# Altium PCB jz_control0301.PcbDoc
Units mm, origin at the board's own origin, x right, y up, seen from the top; angles counter-clockwise.
Board outline 62.1 x 70.23 mm, 2 copper layers (Top Layer, Bottom Layer); 42 components, 42 nets, 230 pads, 18 vias.
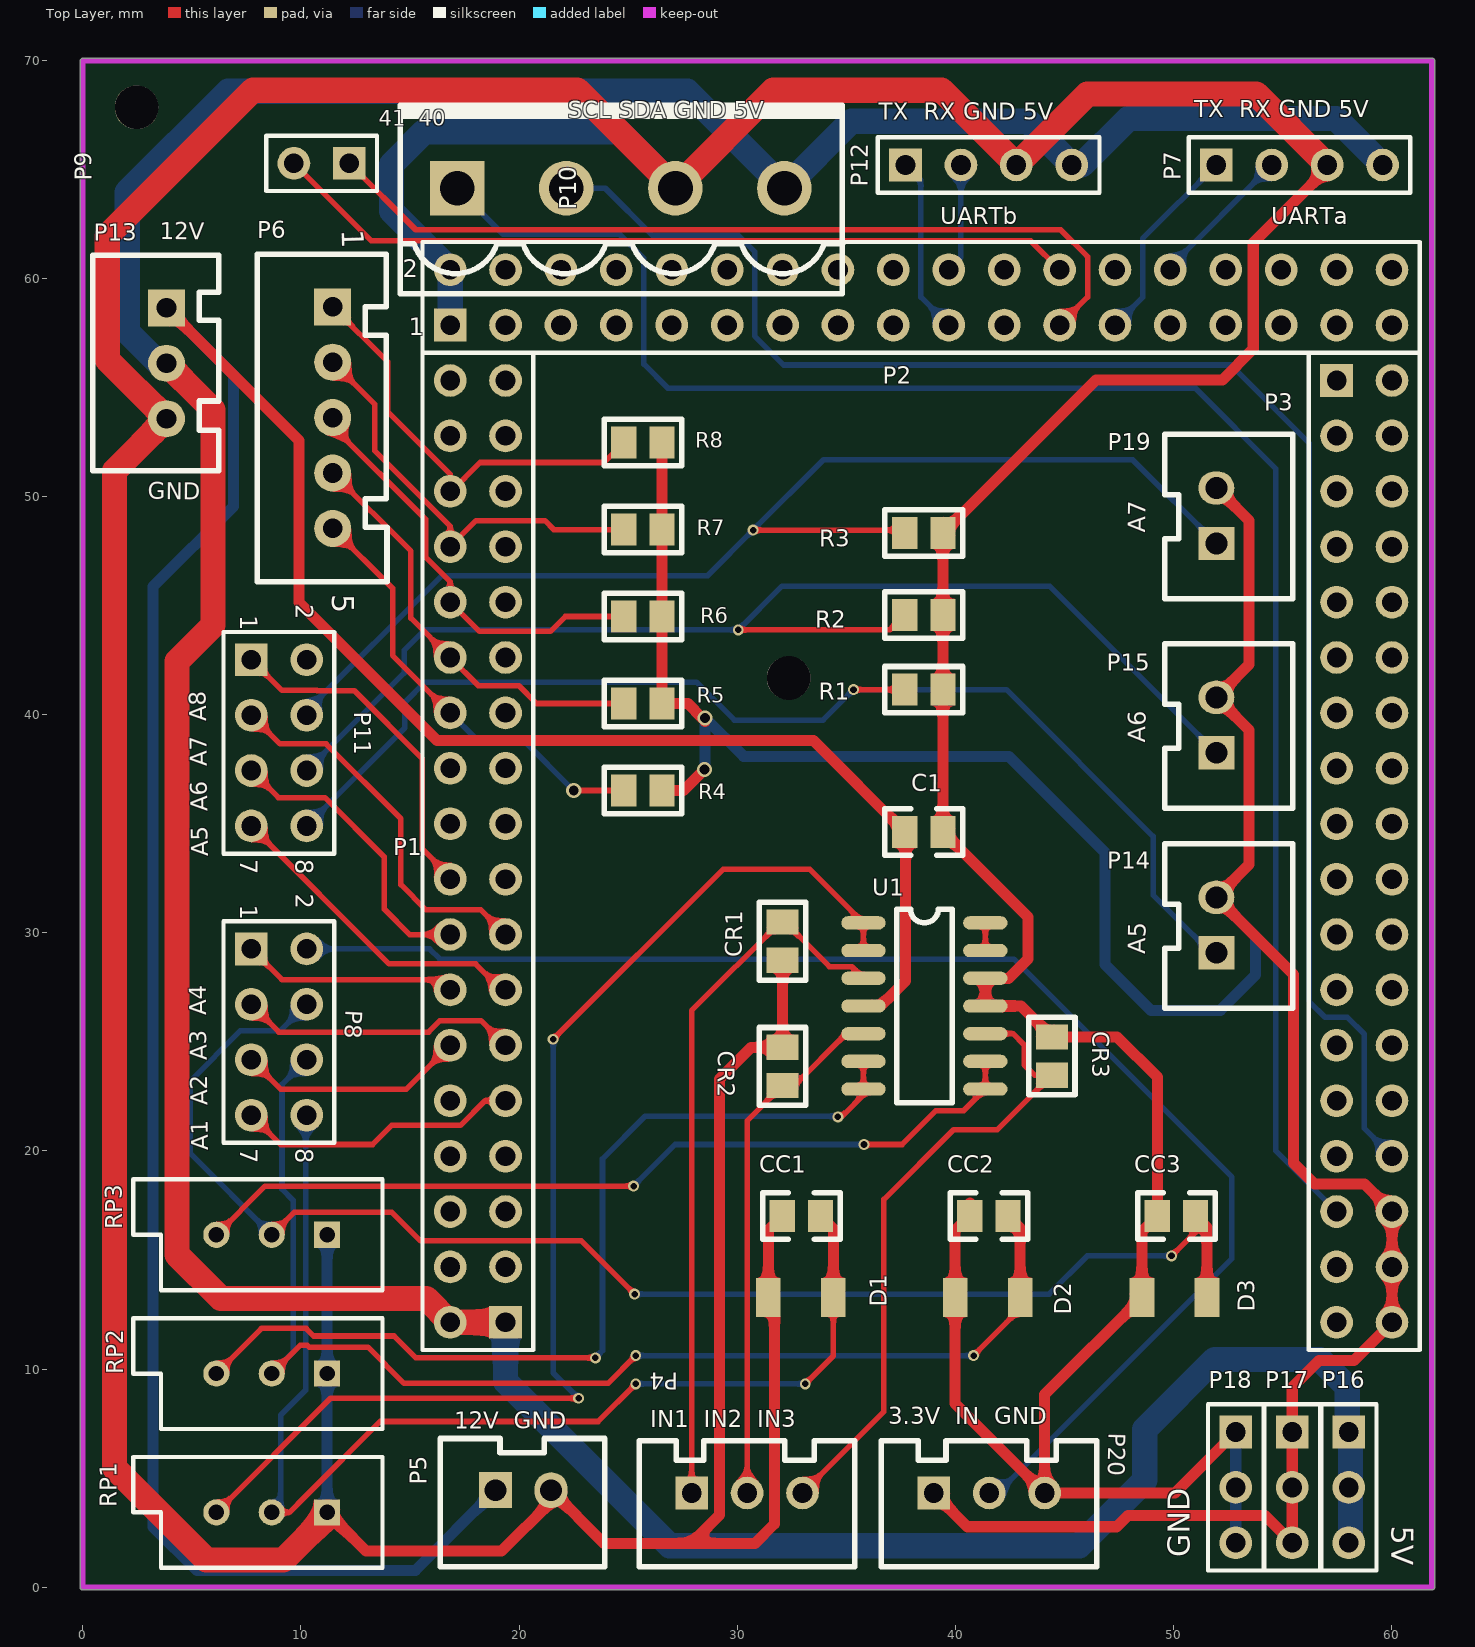
[diagram p0: Top Layer view]
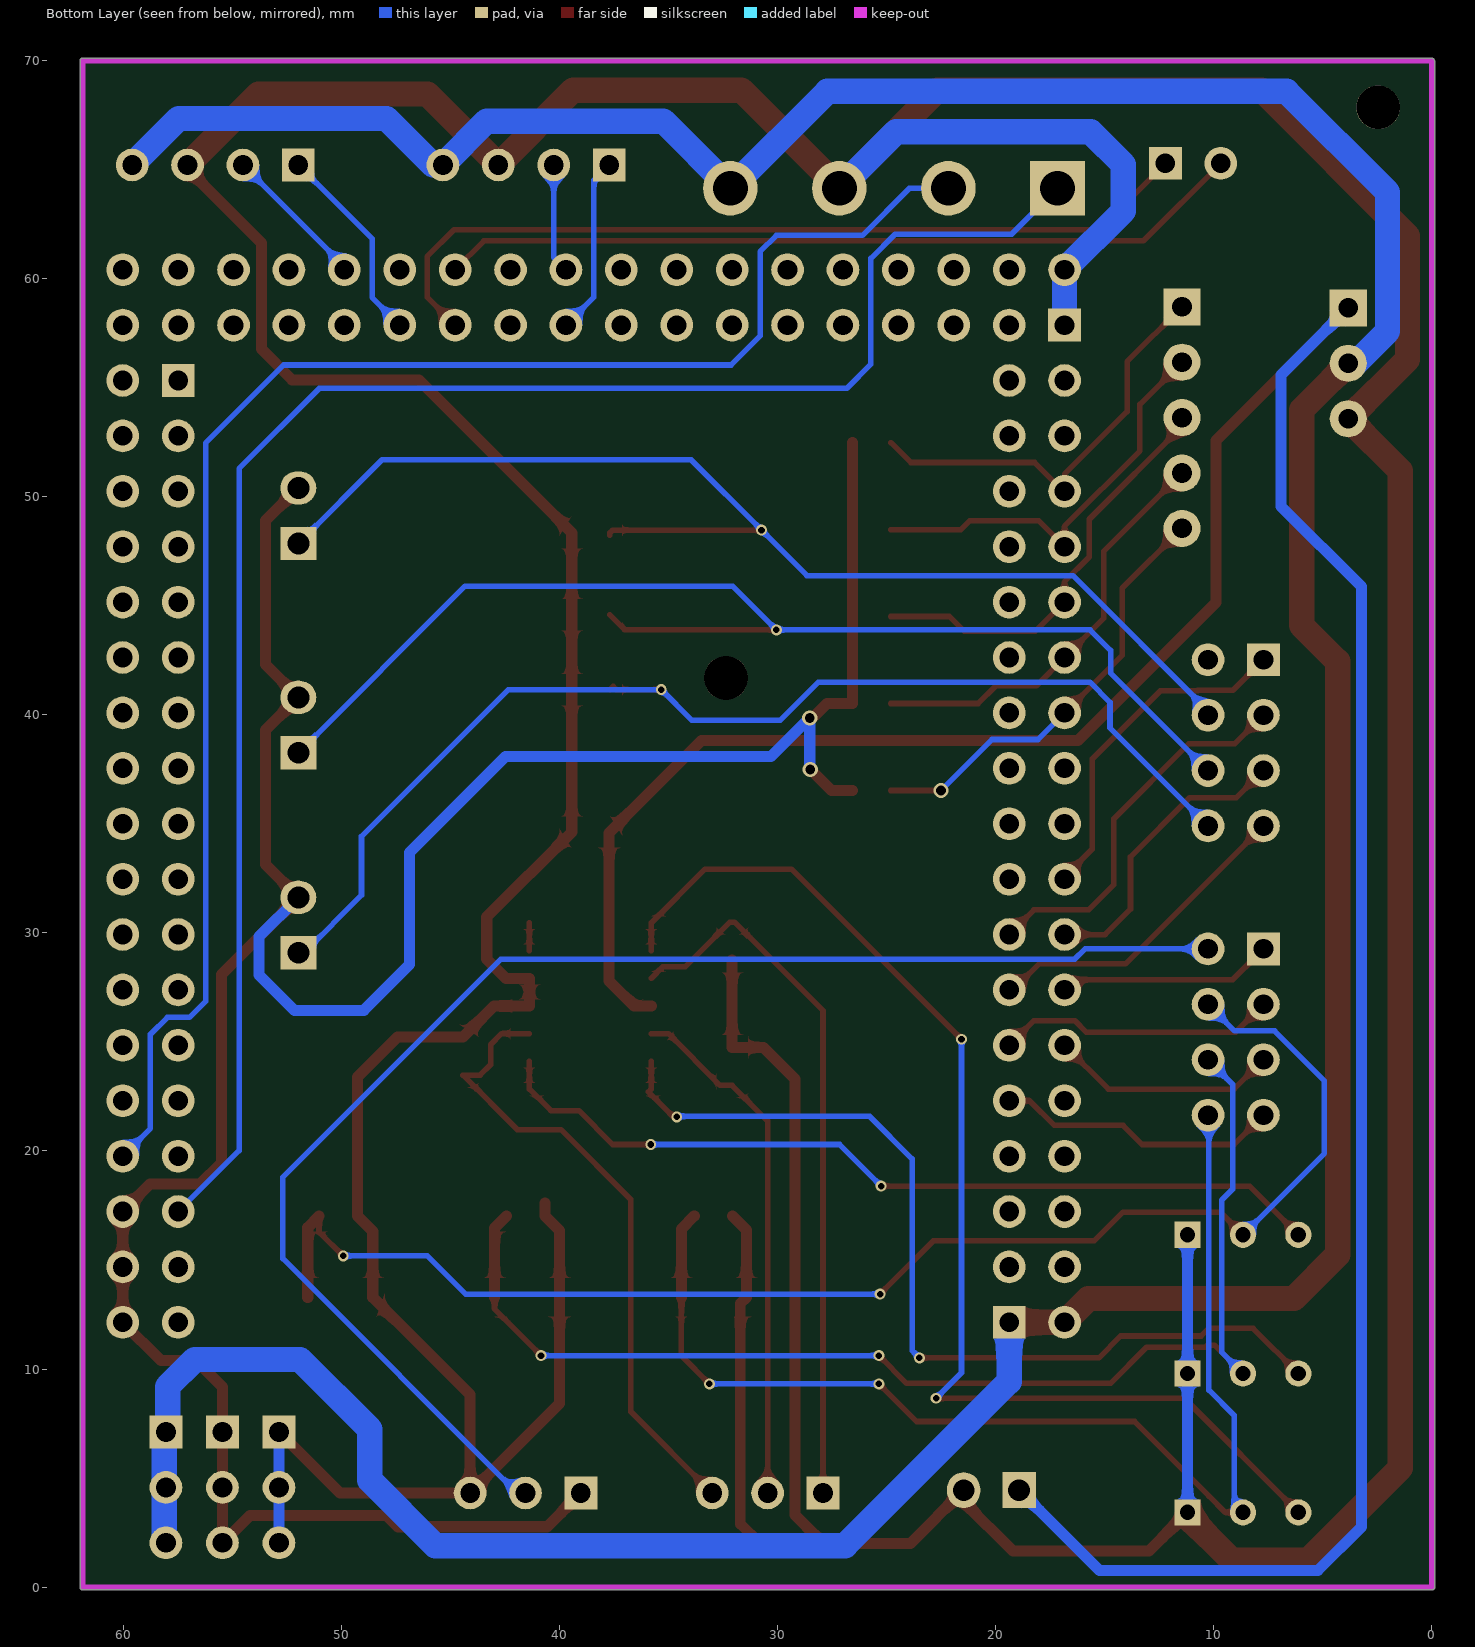
[diagram p1: Bottom Layer view, seen from below]

## Layer stack, top to bottom
Top Solder: solder mask 0.0102, Solder Resist, Dk 3.5
Top Layer: signal copper 0.0356
Dielectric 1: dielectric 0.32, FR-4, Dk 4.8
Bottom Layer: signal copper 0.0356
Bottom Solder: solder mask 0.0102, Solder Resist, Dk 3.5

## Board outline
-0.127,0 -0.127,69.952 cw(c0,69.952) -0.076,70.053 cw(c0.025,69.977) 0.025,70.104 61.849,70.104 cw(c61.849,69.977) 61.976,69.977 61.976,0 cw(c61.849,0) 61.849,-0.127 0,-0.127 cw(c0,0)

## Design rules (kind name [scope] priority, off if disabled: settings)
Clearance [All] p1: gap=0.254 ignorepadtopadclearanceinfootprint=FALSE except(0: Arc-Hole Track-Hole SMDPad-Hole THPad-Hole Via-Hole Fill-Hole Poly-Hole Region-Hole Text-Hole)
MinimumSolderMaskSliver [All] p1: minsoldermaskwidth=0.178
PolygonConnect [All] p1: connectstyle=Relief reliefconductorwidth=0.254 reliefentries=4 polygonreliefangle="90 Angle" airgapwidth=0.254
RoutingVias [All] p1: holewidth=0.3 width=0.5 viastyle="Through Hole" minholewidth=0.3 minwidth=0.5 maxholewidth=0.711 maxwidth=1.27
SilkToSilkClearance [All] p1: silktosilkclearance=0
SilkToSolderMaskClearance [IsPad] p1: minsilkscreentomaskgap=0 clearancetoexposedcopper=TRUE
SolderMaskExpansion [All] p1: expansion=0.102
Width [All] p1: maxlimit=2.54 minlimit=0.254 preferedwidth=0.254 minimp=50.000000 maximp=50.000000 favimp=50.000000
Width GND [InNet('GND')] p2: maxlimit=2.54 minlimit=0.254 preferedwidth=0.254 minimp=50.000000 maximp=50.000000 favimp=50.000000
Width 3.3V [InNet('VDD3.3')] p3: maxlimit=2.54 minlimit=0.254 preferedwidth=0.508 minimp=50.000000 maximp=50.000000 favimp=50.000000
Width 5V [InNet('V5')] p4: maxlimit=2.54 minlimit=0.254 preferedwidth=1.27 minimp=50.000000 maximp=50.000000 favimp=50.000000
Width POWER [InNet('POWERA')] p5: maxlimit=2.54 minlimit=0.254 preferedwidth=0.508 minimp=50.000000 maximp=50.000000 favimp=50.000000
27 further rules are at their usual default settings.

## Components (designator, comment, footprint, x,y, rotation, side; value= is the part's Value field where it differs from the comment)
C1 "104" LC-0805_C 38.557,34.62 r0 top
CC1 "105" LC-0805_C 32.944,17.018 r0 top
CC2 "105" LC-0805_C 41.542,17.018 r0 top
CC3 "105" LC-0805_C 50.14,17.018 r0 top
CR1 "150" LC-0805_R 32.08,29.616 r270 top
CR2 "150" LC-0805_R 32.08,23.876 r90 top
CR3 "150" LC-0805_R 44.425,24.347 r90 top
D1 "Diode  Zener" LC-1206 32.918,13.284 r0 top
D2 "Diode  Zener" LC-1206 41.482,13.284 r0 top
D3 "Diode  Zener" LC-1206 50.047,13.284 r0 top
P1 "Header 18X2" HDR2X18 19.38,12.141 r90 top locked
P2 "Header 18X2" HDR2X18 16.84,57.861 r0 top locked
P3 "Header 18X2" HDR2X18 57.48,55.321 r270 top locked
P4 "Header 3" XH2.54-3 27.915,4.318 r0 top
P5 "Header 2" XH2.54-2 21.466,4.445 r0 top
P6 "Header 5" XH2.54-LI-5P 11.455,53.619 r270 top
P7 "Header 4" HDR1X4 51.968,65.202 r0 top
P8 "Header 4X2" HDR2X4 7.722,29.261 r270 top
P9 "Header 2" HDR1X2 12.217,65.278 r180 top
P10 "Header 4" KF2EDGK5.0-LI-4P 24.663,64.135 r0 top
P11 "Header 4X2" HDR2X4 7.722,42.52 r270 top
P12 "Header 4" HDR1X4 37.719,65.202 r0 top
P13 "Header 3" XH2.54-LI-3P 3.835,56.109 r270 top
P14 "Header 2" XH2.54-2 51.968,31.626 r90 top
P15 "Header 2" XH2.54-2 51.968,40.795 r90 top
P16 "Header 3" HDR1X3 58.039,7.112 r270 top
P17 "Header 3" HDR1X3 55.448,7.112 r270 top
P18 "Header 3" HDR1X3 52.857,7.112 r270 top
P19 "Header 2" XH2.54-2 51.968,50.396 r90 top
P20 "Header 3" XH2.54-3 39.014,4.318 r0 top
R1 "3.3K" LC-0805_R 38.557,41.148 r0 top value=30K
R2 "3.3K" LC-0805_R 38.557,44.577 r0 top value=30K
R3 "3.3K" LC-0805_R 38.557,48.336 r0 top value=30K
R4 "150" LC-0805_R 25.679,36.525 r180 top
R5 "150" LC-0805_R 25.679,40.513 r180 top
R6 "150" LC-0805_R 25.679,44.501 r180 top
R7 "150" LC-0805_R 25.679,48.489 r180 top
R8 "150" LC-0805_R 25.679,52.476 r180 top
RP1 "10K" VR5 8.661,3.429 r180 top
RP2 "10K" VR5 8.661,9.792 r180 top
RP3 "10K" VR5 8.661,16.154 r180 top
U1 "LM324AD" SO-14 32.182,32.385 r0 top

## Footprints (in the part's own frame and the unit in brackets; to place one, negate y for a bottom-side part, rotate by r counter-clockwise, add the part's x,y. Pads: shape width x height; smd on the part's side, far side on the other; paste and mask are expansions set on the pad)
HDR1X2 [mm] "Connector; Header; 2 Position"
  rect 1.5x1.5 hole 0.9: 1(0,0)
  round 1.5 hole 0.9: 2(2.54,0)
  silkscreen extent -1.27,-1.27 3.81,1.27
HDR1X3 [mm] "Connector; Header; 3 Position"
  rect 1.5x1.5 hole 0.9: 1(0,0)
  round 1.5 hole 0.9: 2(2.54,0) 3(5.08,0)
  silkscreen extent -1.27,-1.27 6.35,1.27
HDR1X4 [mm] "Connector; Header; 4 Position"
  rect 1.5x1.5 hole 0.9: 1(0,0)
  round 1.5 hole 0.9: 2(2.54,0) 3(5.08,0) 4(7.62,0)
  silkscreen extent -1.27,-1.27 8.89,1.27
HDR2X4 [mm] "Connector; Header; 4x2 Position"
  rect 1.5x1.5 hole 0.9: 1(0,0)
  round 1.5 hole 0.9: 2(0,2.54) 3(2.54,0) 4(2.54,2.54) 5(5.08,0) 6(5.08,2.54) 7(7.62,0) 8(7.62,2.54)
  silkscreen extent -1.27,-1.27 8.89,3.81
HDR2X18 [mm] "Connector; Header; 18x2 Position"
  rect 1.5x1.5 hole 0.9: 1(0,0)
  round 1.5 hole 0.9: 2(0,2.54) 3(2.54,0) 4(2.54,2.54) 5(5.08,0) 6(5.08,2.54) 7(7.62,0) 8(7.62,2.54) 9(10.16,0) 10(10.16,2.54) 11(12.7,0) 12(12.7,2.54) 13(15.24,0) 14(15.24,2.54) 15(17.78,0) 16(17.78,2.54) 17(20.32,0) 18(20.32,2.54) 19(22.86,0) 20(22.86,2.54) 21(25.4,0) 22(25.4,2.54) 23(27.94,0) 24(27.94,2.54) 25(30.48,0) 26(30.48,2.54) 27(33.02,0) 28(33.02,2.54) 29(35.56,0) 30(35.56,2.54) 31(38.1,0) 32(38.1,2.54) 33(40.64,0) 34(40.64,2.54) 35(43.18,0) 36(43.18,2.54)
  silkscreen extent -1.27,-1.27 44.45,3.81
KF2EDGK5.0-LI-4P [mm] "立插端子"
  rect 2.5x2.5 hole 1.6: 1(-7.5,0)
  round 2.5 hole 1.6: 2(-2.5,0) 3(2.5,0) 4(7.5,0)
  silkscreen extent -10.12,-4.83 10.17,3.81, body extent -10.04,-4.75 10.04,3.75, height 11.25
LC-0805_C [mm]
  rect 1.16x1.47 smd: 1(-0.875,0) 2(0.875,0)
  silkscreen extent -1.78,-1.06 1.78,1.06, body extent -1,-0.63 1,0.63, height 0.77
LC-0805_R [mm]
  rect 1.16x1.47 smd: 1(-0.875,0) 2(0.875,0)
  silkscreen extent -1.78,-1.06 1.78,1.06, body extent -1,-0.62 1,0.63, height 0.49
LC-1206 [mm]
  rect 1.13x1.8 smd: 1(-1.49,0) 2(1.49,0)
SO-14 [mil]
  oval 80x24 smd: 1(142,-76) 2(142,-126) 3(142,-176) 4(142,-226) 5(142,-276) 6(142,-326) 7(142,-376) 8(362,-376) 9(362,-326) 10(362,-276) 11(362,-226) 12(362,-176) 13(362,-126) 14(362,-76)
  silkscreen extent 202,-401 302,-51
VR5 [mm] "Thru-Hole; 3 Leads"
  rect 1.2x1.2 hole 0.7: 1(-2.54,0)
  round 1.2 hole 0.7: 2(0,0) 3(2.54,0)
  silkscreen extent -5.08,-2.54 6.35,2.54
XH2.54-2 [mil]
  rect 60x65 hole 39.37: 1(-100.1,0)
  oval 60x65 hole 39.37: 2(0,0)
  silkscreen extent -200,-138 97,93, body extent -198,-142 98,94, height 276
XH2.54-3 [mm]
  rect 1.5x1.5 hole 0.9: 1(0,0)
  round 1.5 hole 0.9: 2(2.54,0) 3(5.08,0)
  silkscreen extent -2.41,-3.38 7.47,2.39, body extent -2.41,-3.41 7.49,2.34, height 7
XH2.54-LI-3P [mm] "接插件，3P"
  rect 1.7x1.7 hole 0.9: 1(-2.54,0)
  round 1.7 hole 0.9: 2(0,0) 3(2.54,0)
  silkscreen extent -4.95,-3.38 4.93,2.39, body extent -5.04,-3.3 5.04,2.4, height 7.03
XH2.54-LI-5P [mm] "接插件，5P"
  rect 1.7x1.7 hole 0.9: 1(-5.08,0)
  round 1.7 hole 0.9: 2(-2.54,0) 3(0,0) 4(2.54,0) 5(5.08,0)
  silkscreen extent -7.48,-3.45 7.52,2.49, body extent -7.58,-3.3 7.58,2.4, height 7.03

## Part data
C1: library part CAP(瓷片,104), "1.02.08.0014"
CC1 CC2 CC3: library part "Cap Chip 0805", "Polarized Capacitor (Radial)", Published=8-Jun-2000, Publisher="Altium Limited", Revision="July-2002: Re-released for DXP Platform."
CR1 CR2 CR3 R4 R5 R6 R7 R8: library part "Resistor Chip 0805", "Resistor", Published=8-Jun-2000, Publisher="Altium Limited", Revision="July-2002: Re-released for DXP Platform."
D1 D2 D3: "Zener Diode", Published=8-Jun-2000, Publisher="Altium Limited", Revision="July-2002: Re-released for DXP Platform."
P1 P2 P3: "Header, 18-Pin, Dual row", LatestRevisionDate=17-Jul-2002, LatestRevisionNote="Re-released for DXP Platform.", Publisher="Altium Limited"
P4 P13 P16 P17 P18 P20: "Header, 3-Pin", LatestRevisionDate=17-Jul-2002, LatestRevisionNote="Re-released for DXP Platform.", Publisher="Altium Limited"
P5 P9 P14 P15 P19: "Header, 2-Pin", LatestRevisionDate=17-Jul-2002, LatestRevisionNote="Re-released for DXP Platform.", Publisher="Altium Limited"
P6: "Header, 5-Pin", LatestRevisionDate=17-Jul-2002, LatestRevisionNote="Re-released for DXP Platform.", Publisher="Altium Limited"
P7 P10 P12: "Header, 4-Pin", LatestRevisionDate=17-Jul-2002, LatestRevisionNote="Re-released for DXP Platform.", Publisher="Altium Limited"
P8 P11: "Header, 4-Pin, Dual row", LatestRevisionDate=17-Jul-2002, LatestRevisionNote="Re-released for DXP Platform.", Publisher="Altium Limited"
R1 R2 R3: library part Res2, "Resistor", LatestRevisionDate=17-Jul-2002, LatestRevisionNote="Re-released for DXP Platform.", PackageDescription="Axial Device, Thru-Hole; 2 Leads; 0.4 in Pin Spacing", PackageReference=AXIAL-0.4, Published=8-Jun-2000, Publisher="Altium Limited"
RP1 RP2 RP3: library part Res_t
U1: "Quadruple Operational Amplifier", PackageDocument=Jan-1998, ComponentLink1Description="Manufacturer Link", ComponentLink1URL=http://www.ti.com/, DatasheetDocument=Jan-1989, LatestRevisionDate=4-Mar-2005, LatestRevisionNote="Stylized 3D Model Added.", PackageReference=D014, Published=15-Apr-2002, Publisher="Altium Limited"

## Free pads (board coordinates)
  round 2 hole 2 unplated: 2(2.464,67.843) 3(32.36,41.681)

## Via types
v1: diameter 0.5, hole 0.3, Top Layer to Bottom Layer, 15 vias
v2: diameter 0.7, hole 0.45, Top Layer to Bottom Layer, 3 vias

## Nets (pads, with @x,y where several pads share a name; then routed paths per layer and width w, separated by ;. In a path a pad name is that pad's centre, name@x,y a point inside that pad or via, vN(x,y) a via of type N, cw(c..) or ccw(c..) an arc to the next point about the centre after c; other vN are vias at no path point)
A1: CC1.2 D1.2 P8.8 RP1.2 | length 54.5
  Top Layer w0.254: RP1.2 9.474,3.429 10.22,4.175 10.22,4.187 13.628,7.595 23.622,7.595 v1(25.349,9.322) ; v1(33.122,9.322) 34.408,10.609 D1.2
  Top Layer w0.508: CC1.2 34.408,16.428 D1.2
  Bottom Layer w0.254: RP1.2 9.068,3.429 9.068,7.881 10.22,9.034 10.22,21.6 P8.8 ; v1(25.349,9.322) v1(33.122,9.322)
A2: CC2.2 D2.2 P8.6 RP2.2 | length 57
  Top Layer w0.254: RP2.2 9.97,11.1 10.279,11.1 10.373,11.007 13.073,11.007 14.732,9.347 24.079,9.347 v1(25.349,10.617) ; v1(40.843,10.617) 42.973,12.747 D2.2
  Top Layer w0.508: CC2.2 42.973,16.462 D2.2
  Bottom Layer w0.254: RP2.2 9.642,10.773 9.642,17.739 9.131,18.251 9.131,23.05 P8.6 ; v1(25.349,10.617) v1(40.843,10.617)
A3: CC3.2 D3.2 P8.4 RP3.2 | length 65.6
  Top Layer w0.254: RP3.2 9.703,17.196 14.16,17.196 15.481,15.875 22.86,15.875 v1(25.298,13.437) ; v1(49.911,15.189) 51.015,16.293 CC3.2
  Top Layer w0.508: CC3.2 51.537,16.496 D3.2
  Bottom Layer w0.254: RP3.2 4.928,19.888 4.928,23.216 7.214,25.502 9.042,25.502 P8.4 ; v1(25.298,13.437) 44.298,13.437 46.05,15.189 v1(49.911,15.189)
A4: P8.2 P20.2 | length 66.1
  Bottom Layer w0.254: P8.2 15.901,29.261 16.372,28.79 42.685,28.79 52.68,18.796 52.68,15.062 41.935,4.318 P20.2
A5: P11.8 P14.1 R1.1 | length 55.5
  Top Layer w0.254: v1(35.331,41.148) 37.389,41.148 37.536,41.295 R1.1
  Bottom Layer w0.254: P11.8 14.757,39.395 14.757,40.564 15.684,41.49 28.131,41.49 29.87,39.751 33.934,39.751 v1(35.331,41.148) 42.342,41.148 49.073,34.417 49.073,31.725 51.714,29.083 P14.1
A6: P11.6 P15.1 R2.1 | length 56.9
  Top Layer w0.254: v1(30.048,43.891) 36.996,43.891 R2.1
  Bottom Layer w0.254: P11.6 14.732,41.91 14.732,42.951 15.672,43.891 v1(30.048,43.891) 32.055,45.898 44.323,45.898 P15.1
A7: P11.4 P19.1 R3.1 | length 55.4
  Top Layer w0.254: v1(30.734,48.463) 37.555,48.463 R3.1 R3.1@37.682,48.232
  Bottom Layer w0.254: P11.4 10.262,40.182 16.46,46.38 28.651,46.38 v1(30.734,48.463) 33.96,51.689 48.133,51.689 P19.1
ADAIN0: P1.9 P8.7 | length 13
  Top Layer w0.254: P8.7 9.068,20.295 13.284,20.295 14.16,21.17 17.309,21.17 18.44,22.301 P1.9
ADAIN1: P1.12 P8.5 | length 10.5
  Top Layer w0.254: P8.5 9.068,22.835 14.834,22.835 P1.12
ADAIN2: P1.11 P8.3 | length 12.9
  Top Layer w0.254: P8.3 8.992,25.451 15.85,25.451 16.372,25.972 18.249,25.972 P1.11
ADAIN3: P1.14 P8.1 | length 9.9
  Top Layer w0.254: P8.1 9.131,27.852 16.37,27.852 P1.14
ADAIN4: P1.13 P11.7 | length 14.8
  Top Layer w0.254: P11.7 14.046,28.575 18.009,28.575 19.202,27.381 P1.13
ADAIN5: P1.16 P11.5 | length 14.2
  Top Layer w0.254: P11.5 8.966,36.195 11.1,36.195 13.818,33.477 13.818,31.09 14.986,29.921 P1.16 P1.16@16.84,30.455
ADAIN6: P1.15 P11.3 | length 17.6
  Top Layer w0.254: P11.3 9.042,38.659 11.151,38.659 14.58,35.23 14.58,32.207 15.735,31.052 18.249,31.052 P1.15
ADAIN7: P1.18 P11.1 | length 15.8
  Top Layer w0.254: P11.1 9.131,41.111 10.73,41.111 10.743,41.097 12.446,41.097 15.57,37.973 15.57,33.833 16.84,32.563 P1.18
EPWM1A: P1.32 P6.1 R8.2 | length 19.6
  Top Layer w0.254: P6.1 13.97,56.185 13.97,53.899 16.84,51.029 P1.32 16.891,50.241 18.212,51.562 23.89,51.562 R8.2
EPWM2A: P1.30 P6.2 R7.2 | length 19.3
  Top Layer w0.254: P6.2 13.386,54.229 13.386,52.096 16.84,48.642 P1.30 18.034,48.895 21.184,48.895 21.59,48.489 R7.2
EPWM3A: P1.28 P6.3 R6.2 | length 19.5
  Top Layer w0.254: P6.3 11.455,53.213 15.709,48.959 15.709,47.233 16.84,46.102 P1.28 18.186,43.815 21.438,43.815 22.123,44.501 R6.2
EPWM4A: P1.26 P6.4 R5.2 | length 19.5
  Top Layer w0.254: P6.4 15.037,47.498 15.037,44.425 P1.26 18.136,41.326 19.99,41.326 20.803,40.513 R5.2
EPWM5A: P1.24 P6.5 R4.2 | length 20.1
  Top Layer w0.254: P6.5 14.199,45.796 14.199,42.723 P1.24
  Top Layer w0.256: v2(22.504,36.525) R4.2
  Bottom Layer w0.256: P1.24 18.059,38.862 20.168,38.862 v2(22.504,36.525)
GND: C1.2 CC1.1 CC2.1 CC3.1 CR1.2 CR2.2 CR3.2 D1.1 D2.1 D3.1 P2.1 P2.2 P5.2 P7.3 P10.3 P12.3 P13.3 P18.1 P18.2 P18.3 P20.3 R1.2 R2.2 R3.2 RP1.1 RP2.1 RP3.1 U1.11 U1.12 | length 354.5
  Top Layer w0.5: 30.81,2.007 31.709,2.905 31.709,13.004 D1.1
  Top Layer w0.508: RP1.1 12.979,1.651 19.202,1.651 21.466,3.914 P5.2 23.904,2.007 27.889,2.007 ; 30.81,2.007 27.889,2.007 ; D1.1 31.428,16.378 CC1.1 ; CR1.2 CR2.2 30.644,24.751 29.197,23.304 29.197,3.314 27.889,2.007 ; CC2.1@40.667,17.604 CC2.1 39.993,16.344 D2.1 39.993,8.42 P20.3 ; P18.1 50.063,4.318 P20.3 ; P7.3 57.048,65.024 53.658,61.634 53.658,56.757 52.248,55.347 46.443,55.347 R3.2 R2.2 R1.2 C1.2 43.332,30.72 43.332,28.804 42.443,27.915 U1.12 U1.11 43.002,26.645 CR3.2 47.422,25.222 49.265,23.379 CC3.1 48.557,16.31 D3.1 44.094,8.822 P20.3
  Top Layer w1.16: RP1.1 11.201,3.251 9.195,1.245 5.664,1.245 1.448,5.461 1.448,51.181 P13.3 1.118,56.286 1.118,61.951 7.798,68.631 22.668,68.631 P10.3 31.659,68.631 39.37,68.631 P12.3 46.05,68.453 53.797,68.453 P7.3
  Bottom Layer w0.508: RP1.1 RP2.1 RP3.1 ; P18.3 P18.2 P18.1
  Bottom Layer w1.16: P2.1 P2.2 14.148,63.094 14.148,65.227 15.646,66.726 24.573,66.726 P10.3
GPIO40: P2.23 P9.1 | length 39.6
  Top Layer w0.254: P2.23@44.78,58.217 P2.23 46.062,59.143 46.062,60.999
  Top Layer w0.256: P9.1 15.264,62.231 44.83,62.231 46.062,60.999
GPIO41: P2.24 P9.2 | length 37.1
  Top Layer w0.254: P9.2 13.233,61.722 43.459,61.722 P2.24
GPIO42: P2.21
GPIO43: P2.18
GPIO44: P2.17
IN1: CR1.1 P4.1 U1.3 | length 32.7
  Top Layer w0.254: P4.1 27.915,26.43 31.976,30.491 CR1.1 32.184,30.491 34.227,28.448 35.255,28.448 U1.3
IN2: CR2.1 P4.2 U1.5 | length 24
  Top Layer w0.254: P4.2 30.455,21.375 CR2.1 32.628,23.001 35.001,25.375 U1.5
IN3: CR3.1 P4.3 U1.10 | length 29.4
  Top Layer w0.254: P4.3 36.728,8.052 36.728,17.78 39.929,20.98 41.933,20.98 CR3.1 43.635,23.472 43.155,23.952 43.155,24.867 42.647,25.375 U1.10
NetRP1_3: RP1.3 U1.1 U1.2 | length 55.5
  Top Layer w0.254: RP1.3 11.354,8.661 v1(22.733,8.661) ; v1(21.565,25.121) 29.362,32.918 33.325,32.918 U1.1 U1.2
  Bottom Layer w0.254: v1(21.565,25.121) 21.565,9.83 v1(22.733,8.661)
NetRP2_3: RP2.3 U1.6 U1.7 | length 42.9
  Top Layer w0.254: RP2.3 8.191,11.862 10.236,11.862 10.583,11.515 14.266,11.515 15.265,10.516 v1(23.495,10.516) ; v1(34.62,21.565) 34.773,21.565 35.916,22.708 U1.7 U1.6
  Bottom Layer w0.254: v1(23.495,10.516) 23.825,10.846 23.825,19.634 25.781,21.59 34.595,21.59 v1(34.62,21.565)
NetRP3_3: RP3.3 U1.8 U1.9 | length 39.3
  Top Layer w0.254: RP3.3 8.357,18.39 v1(25.248,18.39) ; v1(35.814,20.295) 37.559,20.295 39.109,21.844 40.386,21.844 U1.8 U1.9
  Bottom Layer w0.254: v1(25.248,18.39) 27.153,20.295 v1(35.814,20.295)
NetU1_13: U1.13 U1.14 | length 1.3
  Top Layer w0.254: U1.13 U1.14
POWERA: C1.1 P5.1 P13.1 U1.4 | length 134.1
  Top Layer w0.508: P13.1 9.906,52.578 9.906,45.136 16.231,38.811 33.491,38.811 C1.1 37.719,34.583 37.719,27.788 36.576,26.645 U1.4
  Bottom Layer w0.508: P13.1 6.909,55.575 6.909,49.555 3.226,45.872 3.226,2.769 5.232,0.762 15.24,0.762 P5.1
SCL: P3.31 P10.1 | length 80.9
  Bottom Layer w0.254: P10.1 19.272,62.027 24.614,62.027 25.718,60.922 25.718,56.07 26.822,54.966 51.003,54.966 54.686,51.283 54.686,20.015 P3.31
SDA: P3.30 P10.2 | length 76
  Bottom Layer w0.254: P10.2 23.952,64.135 26.111,61.976 30.048,61.976 30.798,61.226 30.798,57.364 32.13,56.032 52.64,56.032 56.222,52.45 56.222,26.86 56.959,26.123 57.977,26.123 58.75,25.35 58.75,21.031 P3.30
UARTa_RX: P2.28 P7.2 | length 6.7
  Bottom Layer w0.254: P2.28 49.86,60.554 P7.2
UARTa_TX: P2.25 P7.1 | length 9.3
  Bottom Layer w0.254: P2.25 48.59,59.131 48.59,61.824 P7.1
UARTb_RX: P2.20 P12.2 | length 5
  Bottom Layer w0.254: P2.20 40.259,60.96 P12.2
UARTb_TX: P2.19 P12.1 | length 8.2
  Bottom Layer w0.254: P12.1 38.418,64.503 38.418,59.143 P2.19
V5: P1.1 P1.2 P7.4 P10.4 P12.4 P13.2 P16.1 P16.2 P16.3 | length 189.8
  Top Layer w1.16: P13.2 5.969,53.975 5.969,44.094 4.318,42.443 4.318,15.24 6.325,13.233 15.748,13.233 P1.2 P1.1
  Bottom Layer w1.16: P13.2 3.496,56.109 2.032,57.573 2.032,63.957 6.655,68.58 27.718,68.58 P10.4 35.237,67.208 43.332,67.208 P12.4 45.796,65.202 47.93,67.335 57.455,67.335 P7.4 ; P1.1 19.38,9.423 26.899,1.905 45.695,1.905 48.692,4.902 48.692,7.239 51.892,10.439 56.718,10.439 57.963,9.195 57.963,7.188 P16.1 ; P16.3@58.115,2.007 P16.1@58.115,7.087
VDD3.3: P3.32 P3.34 P3.36 P14.2 P15.2 P17.1 P17.2 P17.3 P19.2 P20.1 R4.1 R5.1 R6.1 R7.1 R8.1 | length 134
  Top Layer w0.508: R4.1 27.534,36.525 v2(28.499,37.49) ; R8.1 R7.1 R6.1 R5.1 27.737,40.513 28.397,39.853 v2(28.524,39.853) v2@28.524,39.7 ; P20.1 40.564,2.769 47.396,2.769 47.918,3.29 54.19,3.29 P17.3 P17.2 P17.1 55.448,9.169 56.667,10.389 58.268,10.389 P3.36 P3.34 P3.32 58.762,18.479 56.476,18.479 55.499,19.456 55.499,28.095 P14.2 53.467,33.124 53.467,39.296 P15.2 53.467,42.294 53.467,48.898 P19.2
  Bottom Layer w0.508: v2(28.499,37.49) 28.524,37.516 v2(28.524,39.853) 30.302,38.075 42.469,38.075 46.863,33.68 46.863,28.55 48.971,26.441 52.146,26.441 53.772,28.067 53.772,29.822 P14.2
pads on no net: P1.3 P1.4 P1.5 P1.6 P1.7 P1.8 P1.10 P1.17 P1.19 P1.20 P1.21 P1.22 P1.23 P1.25 P1.27 P1.29 P1.31 P1.33 P1.34 P1.35 P1.36 P2.3 P2.4 P2.5 P2.6 P2.7 P2.8 P2.9 P2.10 P2.11 P2.12 P2.13 P2.14 P2.15 P2.16 P2.22 P2.26 P2.27 P2.29 P2.30 P2.31 P2.32 P2.33 P2.34 P2.35 P2.36 P3.1 P3.2 P3.3 P3.4 P3.5 P3.6 P3.7 P3.8 P3.9 P3.10 P3.11 P3.12 P3.13 P3.14 P3.15 P3.16 P3.17 P3.18 P3.19 P3.20 P3.21 P3.22 P3.23 P3.24 P3.25 P3.26 P3.27 P3.28 P3.29 P3.33 P3.35 P11.2

## Keep-outs
Keep-Out Layer:
  lines w0.254: 0,0 0,69.952 0.025,69.977 61.849,69.977 61.849,0 0,0

## Silkscreen, mask and mechanical layers (free items; w line width, h text height)
Top Overlay:
  text "TX  RX GND 5V" at 50.952,67.386 h0.76
  text "SCL SDA GND 5V" at 22.225,67.335 h0.76
  text "TX  RX GND 5V" at 36.5,67.285 h0.76
  text "41  40" at 13.564,67.005 h0.7
  text "UARTb" at 39.319,62.484 h0.76
  text "UARTa" at 54.483,62.484 h0.76
  text "1" at 11.862,62.23 h1 r271.59
  text "12V" at 3.531,61.798 h0.76 r359.51
  text "GND" at 2.972,49.886 h0.76 r359.51
  text "A7" at 48.717,48.336 h0.8 r88.99
  text "5" at 11.43,45.517 h1 r270
  text "A6" at 48.717,38.71 h0.8 r88.99
  text "A5  A6  A7  A8" at 5.74,33.503 h0.76 r90.77
  text "A5" at 48.717,29.007 h0.8 r88.99
  text "A1  A2  A3  A4" at 5.74,20.041 h0.76 r90.78
  text "3.3V  IN  GND" at 36.932,7.468 h0.76
  text "IN1  IN2  IN3" at 26.01,7.341 h0.76
  text "12V  GND" at 17.018,7.264 h0.76
  text "5V" at 60.02,2.819 h1 r269.48
  text "GND" at 50.749,1.372 h1 r90

## Text inside footprints (layer, text, board x,y; h text height)
P2: Top Overlay "2" at 14.656,60.046 h0.8; Top Overlay "1" at 14.935,57.404 h0.8
P8: Top Overlay "2" at 9.754,31.801 h0.8 r270; Top Overlay "1" at 7.214,31.293 h0.8 r270; Top Overlay "7" at 7.214,20.117 h0.8 r270; Top Overlay "8" at 9.754,20.117 h0.8 r270
P11: Top Overlay "8" at 9.754,33.376 h0.8 r270; Top Overlay "7" at 7.214,33.376 h0.8 r270; Top Overlay "1" at 7.214,44.552 h0.8 r270; Top Overlay "2" at 9.754,45.06 h0.8 r270